# EAGLE board Vernier_Interface_Shield-Panel-v11 (EAGLE 6.5.0)
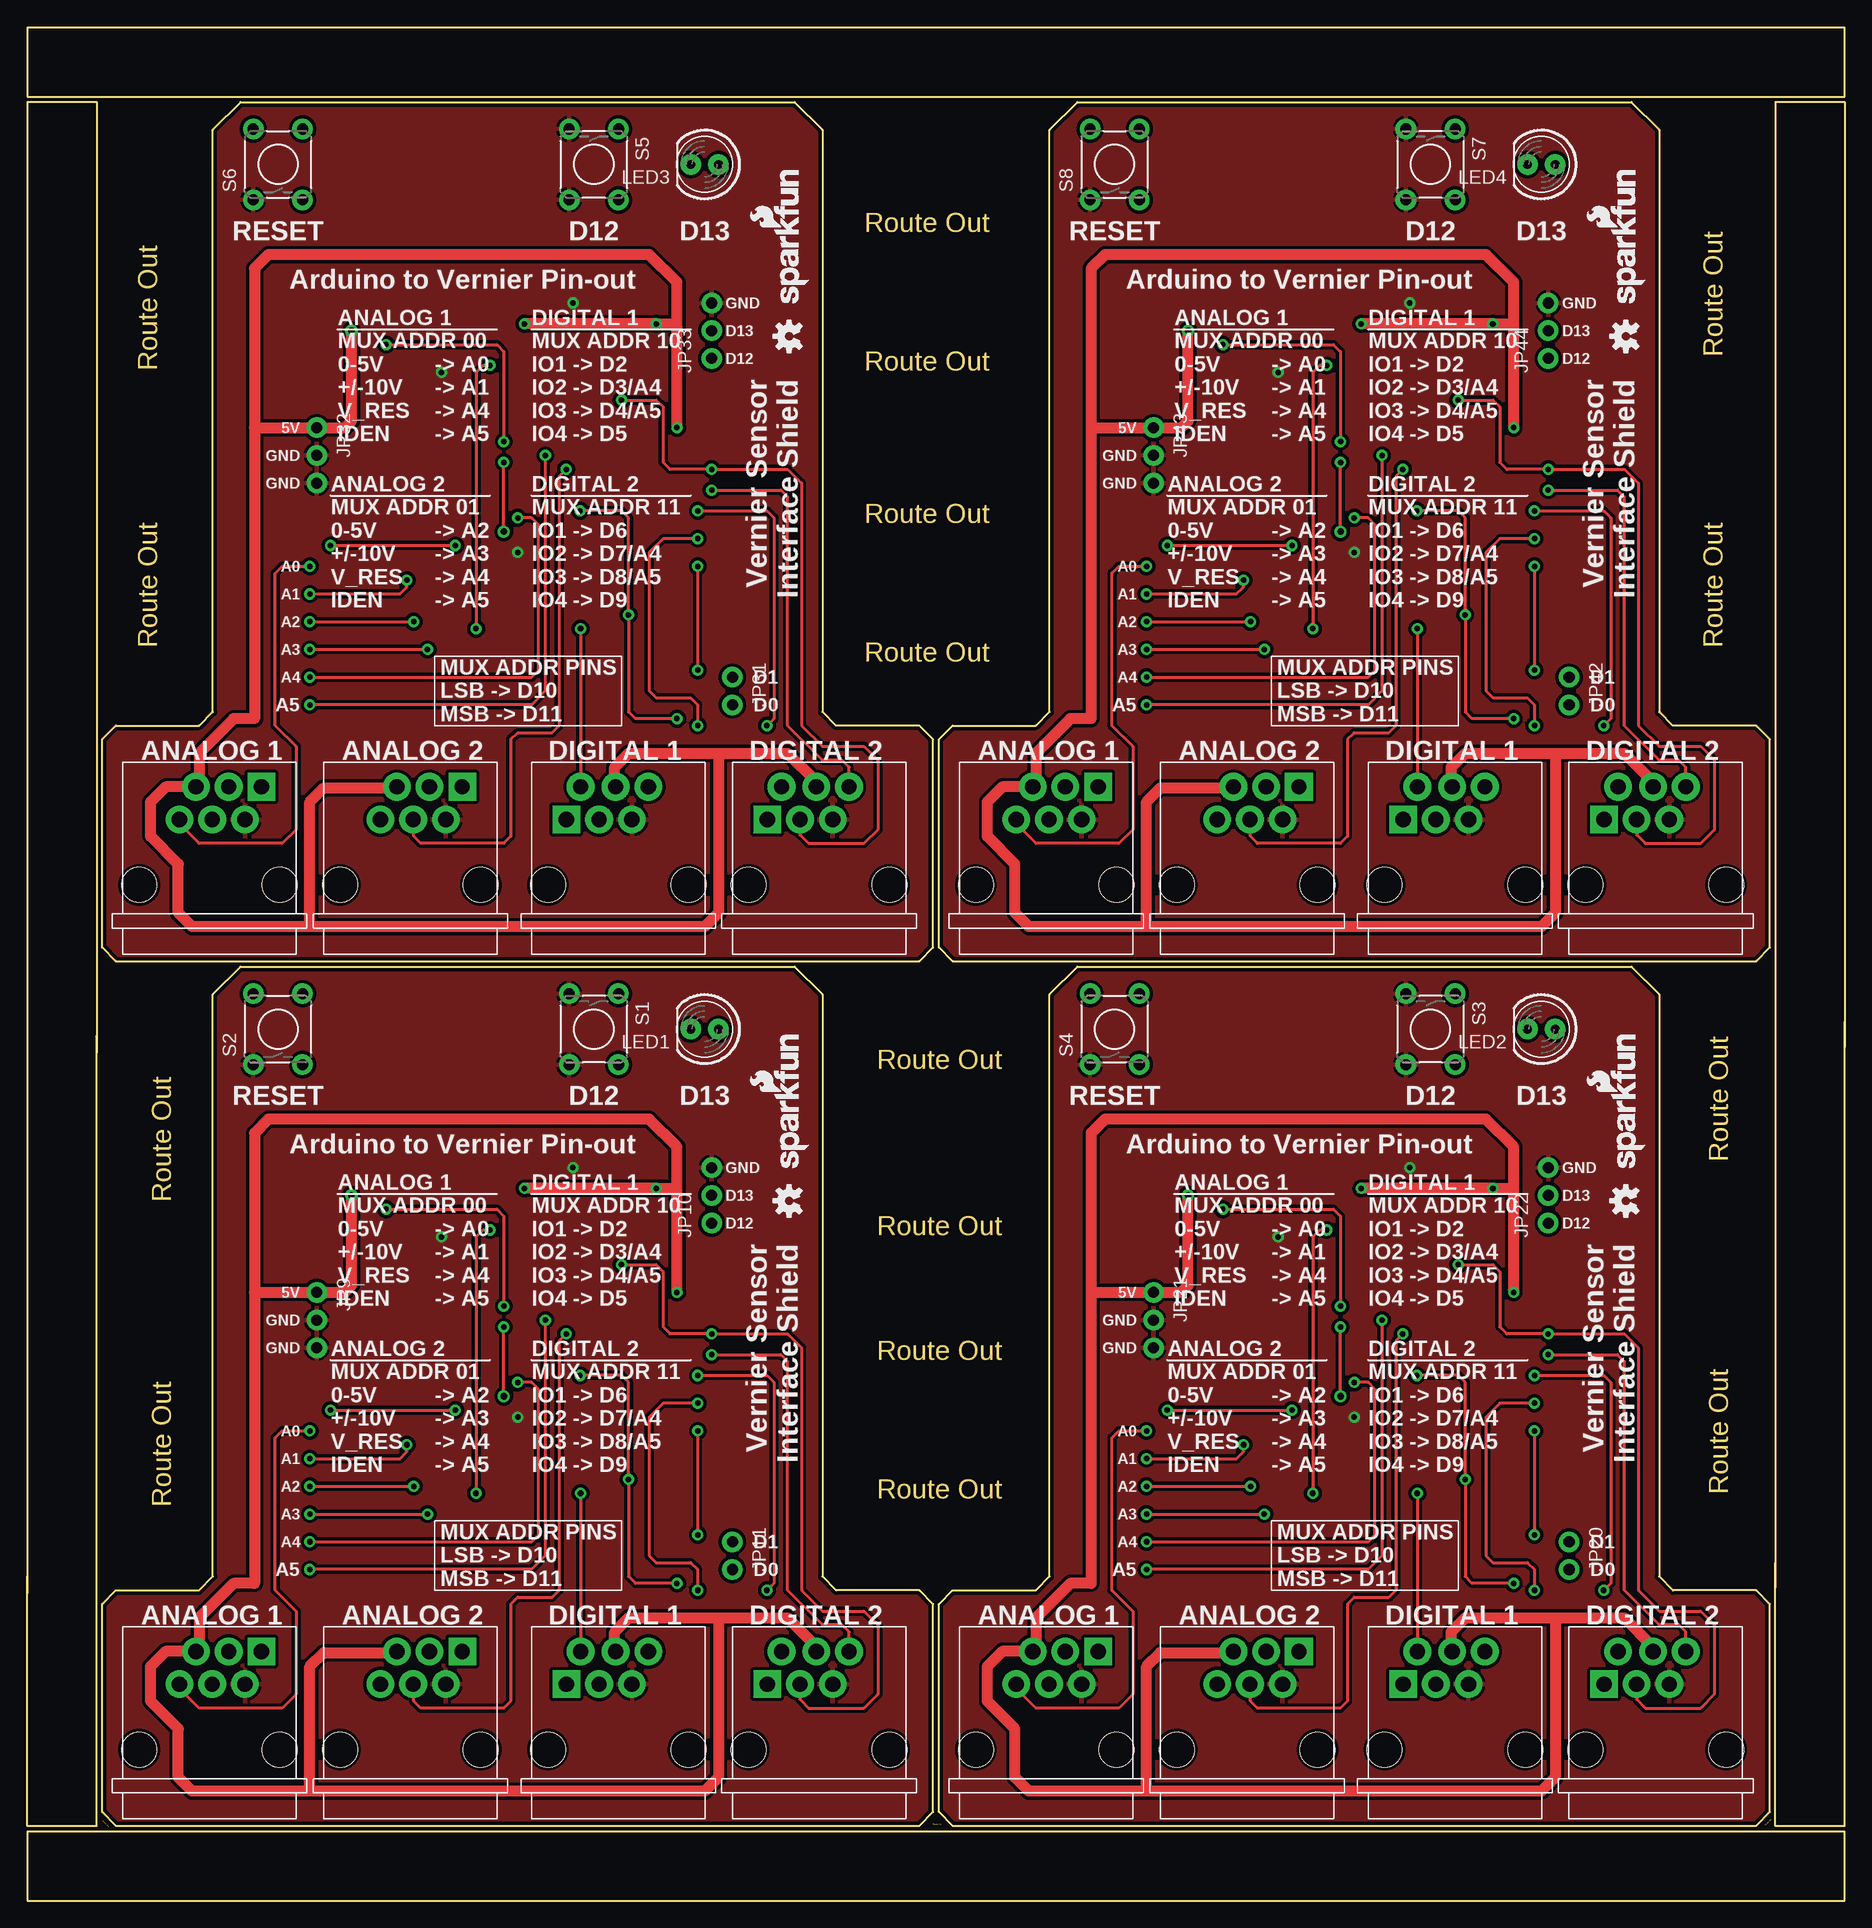
[diagram p0: board, top side]
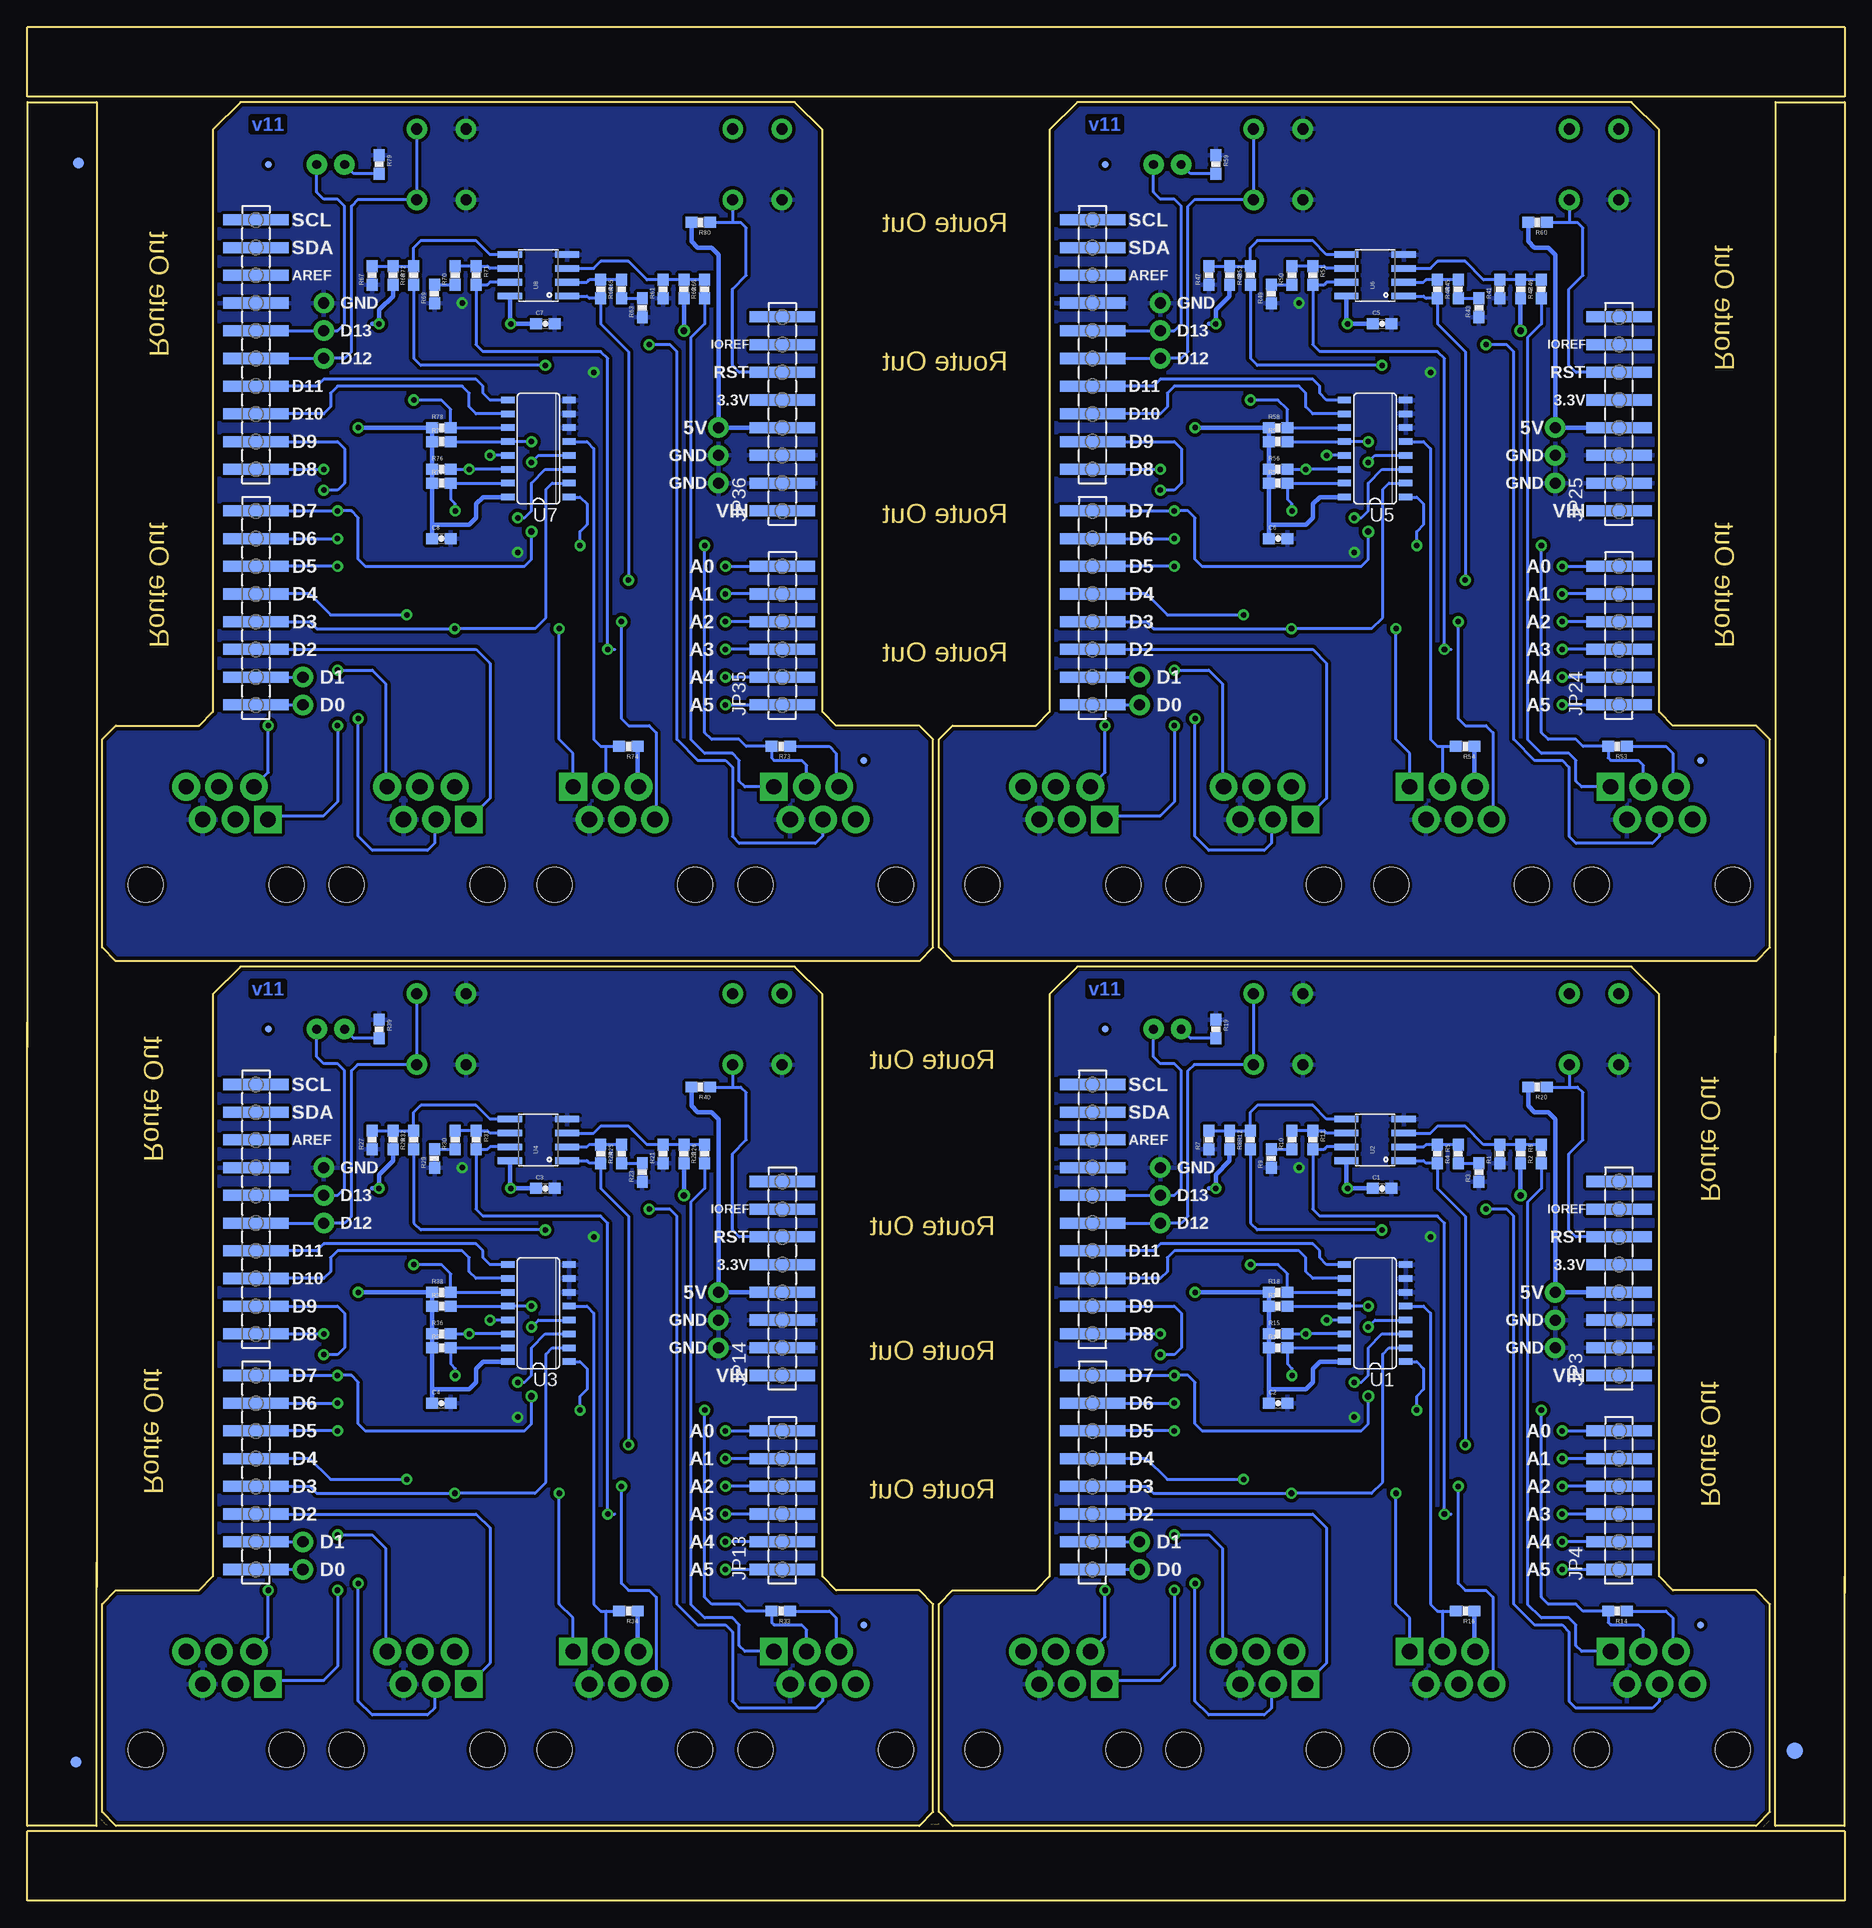
[diagram p1: board, bottom side, seen from below]

Size 166.62 x 171.7 mm. Coordinates in mm from the lower left corner, seen from the top.
Outline: 6.35,79.25 6.35,6.86 0,6.86 0,29.72
Outline: 166.62,80.52 166.62,6.86 160.27,6.86 160.27,30.99
Outline: 0,28.19 0,164.85 6.35,164.85 6.35,77.72
Outline: 160.27,28.7 160.27,164.85 166.62,164.85 166.62,78.23
Outline: 8.13,6.86 81.79,6.86 83.06,8.13 83.06,27.18 81.79,28.45 74.17,28.45 72.9,29.72 72.9,83.06 70.36,85.6 19.56,85.6 17.02,83.06 17.02,29.72 15.75,28.45 8.13,28.45 6.86,27.18 6.86,8.13 8.13,6.86
Outline: 84.84,6.86 158.5,6.86 159.77,8.13 159.77,27.18 158.5,28.45 150.88,28.45 149.61,29.72 149.61,83.06 147.07,85.6 96.27,85.6 93.73,83.06 93.73,29.72 92.46,28.45 84.84,28.45 83.57,27.18 83.57,8.13 84.84,6.86
Outline: 8.13,86.11 81.79,86.11 83.06,87.38 83.06,106.43 81.79,107.7 74.17,107.7 72.9,108.97 72.9,162.31 70.36,164.85 19.56,164.85 17.02,162.31 17.02,108.97 15.75,107.7 8.13,107.7 6.86,106.43 6.86,87.38 8.13,86.11
Outline: 84.84,86.11 158.5,86.11 159.77,87.38 159.77,106.43 158.5,107.7 150.88,107.7 149.61,108.97 149.61,162.31 147.07,164.85 96.27,164.85 93.73,162.31 93.73,108.97 92.46,107.7 84.84,107.7 83.57,106.43 83.57,87.38 84.84,86.11
Outline: 0,0 166.62,0 166.62,6.35 0,6.35 0,0
Outline: 0,165.35 166.62,165.35 166.62,171.7 0,171.7 0,165.35
Copper layers (1*16): Top 0.035mm / dielectric 1.5mm / Bottom 0.035mm
Design rules "SparkFun *": minimum track width 8mil, minimum drill 20mil, track to track 8mil, track to pad 8mil, pad to pad 8mil, via to via 8mil, smd to smd 8mil, copper to edge 8mil, drill to drill 8mil, minimum pad ring 12mil, minimum via ring 10mil, stop-mask expansion 4mil, vias tented up to drill 20mil, thermal gap 10mil

## Footprints (pad centres in the part's own frame; a part is rotated, then mirrored left to right if it is on the bottom)
0603-CAP = smd 1.1 x 1: 1 -0.85,0; 2 0.85,0
FIDUCIAL-1.5X3 = smd 1.5 x 1.5: 1 0,0
FIDUCIAL-1X2 = smd 1 x 1: 1 0,0
MICRO-FIDUCIAL = smd 0.635 x 0.635: 1 0,0
1X10_SMD_MALE = smd 1.02 x 6: 1 0,0; 2 2.54,0; 3 5.08,0; 4 7.62,0; 5 10.16,0; 6 12.7,0; 7 15.24,0; 8 17.78,0; 9 20.32,0; 10 22.86,0
1X08_SMD_MALE = smd 1.02 x 6: 1 0,0; 2 2.54,0; 3 5.08,0; 4 7.62,0; 5 10.16,0; 6 12.7,0; 7 15.24,0; 8 17.78,0
1X06_SMD_MALE = smd 1.02 x 6: 1 0,0; 2 2.54,0; 3 5.08,0; 4 7.62,0; 5 10.16,0; 6 12.7,0
BTA = drill 1.4 pad 2.54 square: 1 12.7,15.35 | drill 1.4 pad 2.54: 2 11.2,12.35; 3 9.7,15.35; 4 8.2,12.35; 5 6.7,15.35; 6 5.2,12.35 | hole 3.2: 14.4,6.35; 1.5,6.35
BTD = drill 1.4 pad 2.54 square: 1 3.2,12.35 | drill 1.4 pad 2.54: 2 4.5,15.35; 3 6.2,12.35; 4 7.7,15.35; 5 9.2,12.35; 6 10.7,15.35 | hole 3.2: 14.4,6.35; 1.5,6.35
1X03_NO_SILK = drill 1.016 pad 1.88: 1 0,0; 2 2.54,0; 3 5.08,0
1X02_NO_SILK = drill 1.016 pad 1.88: 1 0,0; 2 2.54,0
LED5MM = drill 0.813 pad 1.88: A -1.27,0; K 1.27,0
0603-RES = smd 1.1 x 1: 1 -0.85,0; 2 0.85,0
TACTILE-PTH = drill 1.016 pad 1.88: 1 -3.251,2.261; 2 3.251,2.261; 3 -3.251,-2.261; 4 3.251,-2.261
SO16 = smd 0.6 x 1.2: 1 -4.445,-2.8; 2 -3.175,-2.8; 3 -1.905,-2.8; 4 -0.635,-2.8; 5 0.635,-2.8; 6 1.905,-2.8; 7 3.175,-2.8; 8 4.445,-2.8; 9 4.445,2.8; 10 3.175,2.8; 11 1.905,2.8; 12 0.635,2.8; 13 -0.635,2.8; 14 -1.905,2.8; 15 -3.175,2.8; 16 -4.445,2.8
SO08 = smd 0.61 x 2.21: 1 -1.905,-2.616; 2 -0.635,-2.616; 3 0.635,-2.616; 4 1.905,-2.616; 5 1.905,2.616; 6 0.635,2.616; 7 -0.635,2.616; 8 -1.905,2.616

## Placement (x,y rotation side)
C1  0.1uF  [0603-CAP]  42.42,65.28 0 bottom
C2  0.1uF  [0603-CAP]  51.94,45.59 0 bottom
C3  0.1uF  [0603-CAP]  119.13,65.28 0 bottom
C4  0.1uF  [0603-CAP]  128.65,45.59 0 bottom
C5  0.1uF  [0603-CAP]  42.42,144.53 0 bottom
C6  0.1uF  [0603-CAP]  51.94,124.84 0 bottom
C7  0.1uF  [0603-CAP]  119.13,144.53 0 bottom
C8  0.1uF  [0603-CAP]  128.65,124.84 0 bottom
E$1  [FIDUCIAL-1.5X3]  4.57,13.72 0 bottom
E$4  [FIDUCIAL-1X2]  162.18,12.7 0 bottom
E$6  [FIDUCIAL-1X2]  161.93,159.26 180 bottom
FID1  FIDUCIALUFIDUCIAL  [MICRO-FIDUCIAL]  13.21,25.27 90 bottom
FID2  FIDUCIALUFIDUCIAL  [MICRO-FIDUCIAL]  67.82,79.88 0 bottom
FID3  FIDUCIALUFIDUCIAL  [MICRO-FIDUCIAL]  89.92,25.27 90 bottom
FID4  FIDUCIALUFIDUCIAL  [MICRO-FIDUCIAL]  144.53,79.88 0 bottom
FID5  FIDUCIALUFIDUCIAL  [MICRO-FIDUCIAL]  13.21,104.52 90 bottom
FID6  FIDUCIALUFIDUCIAL  [MICRO-FIDUCIAL]  67.82,159.13 0 bottom
FID7  FIDUCIALUFIDUCIAL  [MICRO-FIDUCIAL]  89.92,104.52 90 bottom
FID8  FIDUCIALUFIDUCIAL  [MICRO-FIDUCIAL]  144.53,159.13 0 bottom
JP1  Male  [1X10_SMD_MALE]  68.96,51.94 90 bottom
JP2  Male  [1X08_SMD_MALE]  68.96,30.35 90 bottom
JP3  Male  [1X08_SMD_MALE]  20.7,48.13 90 bottom
JP4  Male  [1X06_SMD_MALE]  20.7,30.35 90 bottom
JP5  BTA  [BTA]  8.76,7.49 0 top
JP6  BTA  [BTA]  27.18,7.49 0 top
JP7  BTD  [BTD]  46.23,7.49 0 top
JP8  BTD  [BTD]  64.64,7.49 0 top
JP9  [1X03_NO_SILK]  26.54,55.75 270 top
JP10  [1X03_NO_SILK]  62.74,62.1 90 top
JP11  M021X02_NO_SILK  [1X02_NO_SILK]  64.64,32.89 270 top
JP12  Male  [1X10_SMD_MALE]  145.67,51.94 90 bottom
JP13  Male  [1X06_SMD_MALE]  97.41,30.35 90 bottom
JP14  Male  [1X08_SMD_MALE]  97.41,48.13 90 bottom
JP15  Male  [1X08_SMD_MALE]  145.67,30.35 90 bottom
JP16  BTD  [BTD]  122.94,7.49 0 top
JP17  BTA  [BTA]  85.47,7.49 0 top
JP18  BTA  [BTA]  103.89,7.49 0 top
JP19  BTD  [BTD]  141.35,7.49 0 top
JP20  M021X02_NO_SILK  [1X02_NO_SILK]  141.35,32.89 270 top
JP21  [1X03_NO_SILK]  103.25,55.75 270 top
JP22  [1X03_NO_SILK]  139.45,62.1 90 top
JP23  Male  [1X10_SMD_MALE]  68.96,131.19 90 bottom
JP24  Male  [1X06_SMD_MALE]  20.7,109.6 90 bottom
JP25  Male  [1X08_SMD_MALE]  20.7,127.38 90 bottom
JP26  Male  [1X08_SMD_MALE]  68.96,109.6 90 bottom
JP27  BTD  [BTD]  46.23,86.74 0 top
JP28  BTA  [BTA]  8.76,86.74 0 top
JP29  BTA  [BTA]  27.18,86.74 0 top
JP30  BTD  [BTD]  64.64,86.74 0 top
JP31  M021X02_NO_SILK  [1X02_NO_SILK]  64.64,112.14 270 top
JP32  [1X03_NO_SILK]  26.54,135 270 top
JP33  [1X03_NO_SILK]  62.74,141.35 90 top
JP34  Male  [1X10_SMD_MALE]  145.67,131.19 90 bottom
JP35  Male  [1X06_SMD_MALE]  97.41,109.6 90 bottom
JP36  Male  [1X08_SMD_MALE]  97.41,127.38 90 bottom
JP37  Male  [1X08_SMD_MALE]  145.67,109.6 90 bottom
JP38  BTD  [BTD]  122.94,86.74 0 top
JP39  BTA  [BTA]  85.47,86.74 0 top
JP40  BTA  [BTA]  103.89,86.74 0 top
JP41  BTD  [BTD]  141.35,86.74 0 top
JP42  M021X02_NO_SILK  [1X02_NO_SILK]  141.35,112.14 270 top
JP43  [1X03_NO_SILK]  103.25,135 270 top
JP44  [1X03_NO_SILK]  139.45,141.35 90 top
LED1  [LED5MM]  62.1,79.88 180 top
LED2  [LED5MM]  138.81,79.88 180 top
LED3  [LED5MM]  62.1,159.13 180 top
LED4  [LED5MM]  138.81,159.13 180 top
LOGO1  OSHW-LOGOS  [OSHW-LOGO-S]  146.56,64.14 90 top
LOGO2  OSHW-LOGOS  [OSHW-LOGO-S]  69.85,64.14 90 top
LOGO3  OSHW-LOGOS  [OSHW-LOGO-S]  69.85,143.38 90 top
LOGO4  OSHW-LOGOS  [OSHW-LOGO-S]  146.56,143.38 90 top
LOGO_1  LOGO-SFESK  [SFE-LOGO-FLAME]  69.09,74.17 90 top
LOGO_2  LOGO-SFENW2  [SFE-NEW-WEB]  148.34,67.18 90 top
LOGO_3  LOGO-SFENW2  [SFE-NEW-WEB]  71.63,67.18 90 top
LOGO_4  LOGO-SFESK  [SFE-LOGO-FLAME]  145.8,74.17 90 top
LOGO_5  LOGO-SFENW2  [SFE-NEW-WEB]  71.63,146.43 90 top
LOGO_6  LOGO-SFESK  [SFE-LOGO-FLAME]  69.09,153.42 90 top
LOGO_7  LOGO-SFENW2  [SFE-NEW-WEB]  148.34,146.43 90 top
LOGO_8  LOGO-SFESK  [SFE-LOGO-FLAME]  145.8,153.42 90 top
R1  10K  [0603-RES]  31.62,68.45 90 bottom
R2  20k  [0603-RES]  27.81,68.45 90 bottom
R3  20k  [0603-RES]  33.53,66.75 90 bottom
R4  20k  [0603-RES]  35.43,68.45 90 bottom
R5  10K  [0603-RES]  37.34,68.45 270 bottom
R6  10K  [0603-RES]  29.72,68.45 270 bottom
R7  10K  [0603-RES]  58.29,69.72 90 bottom
R8  20k  [0603-RES]  54.48,69.72 90 bottom
R9  20k  [0603-RES]  52.58,68.02 90 bottom
R10  20k  [0603-RES]  50.67,69.72 90 bottom
R11  10K  [0603-RES]  48.77,69.72 270 bottom
R12  10K  [0603-RES]  56.39,69.72 270 bottom
R13  10K  [0603-RES]  51.94,54.48 0 bottom
R14  15K  [0603-RES]  20.83,26.54 180 bottom
R15  10K  [0603-RES]  51.94,51.94 0 bottom
R16  15K  [0603-RES]  34.8,26.54 180 bottom
R17  10K  [0603-RES]  51.94,50.67 0 bottom
R18  10K  [0603-RES]  51.94,55.75 0 bottom
R19  330  [0603-RES]  57.66,79.88 270 bottom
R20  10K  [0603-RES]  28.17,74.57 180 bottom
R21  10K  [0603-RES]  108.33,68.45 90 bottom
R22  20k  [0603-RES]  104.52,68.45 90 bottom
R23  20k  [0603-RES]  110.24,66.75 90 bottom
R24  20k  [0603-RES]  112.14,68.45 90 bottom
R25  10K  [0603-RES]  114.05,68.45 270 bottom
R26  10K  [0603-RES]  106.43,68.45 270 bottom
R27  10K  [0603-RES]  135,69.72 90 bottom
R28  20k  [0603-RES]  131.19,69.72 90 bottom
R29  20k  [0603-RES]  129.29,68.02 90 bottom
R30  20k  [0603-RES]  127.38,69.72 90 bottom
R31  10K  [0603-RES]  125.48,69.72 270 bottom
R32  10K  [0603-RES]  133.1,69.72 270 bottom
R33  15K  [0603-RES]  97.54,26.54 180 bottom
R34  15K  [0603-RES]  111.51,26.54 180 bottom
R35  10K  [0603-RES]  128.65,54.48 0 bottom
R36  10K  [0603-RES]  128.65,51.94 0 bottom
R37  10K  [0603-RES]  128.65,50.67 0 bottom
R38  10K  [0603-RES]  128.65,55.75 0 bottom
R39  330  [0603-RES]  134.37,79.88 270 bottom
R40  10K  [0603-RES]  104.88,74.57 180 bottom
R41  10K  [0603-RES]  31.62,147.7 90 bottom
R42  20k  [0603-RES]  27.81,147.7 90 bottom
R43  20k  [0603-RES]  33.53,146 90 bottom
R44  20k  [0603-RES]  35.43,147.7 90 bottom
R45  10K  [0603-RES]  37.34,147.7 270 bottom
R46  10K  [0603-RES]  29.72,147.7 270 bottom
R47  10K  [0603-RES]  58.29,148.97 90 bottom
R48  20k  [0603-RES]  54.48,148.97 90 bottom
R49  20k  [0603-RES]  52.58,147.27 90 bottom
R50  20k  [0603-RES]  50.67,148.97 90 bottom
R51  10K  [0603-RES]  48.77,148.97 270 bottom
R52  10K  [0603-RES]  56.39,148.97 270 bottom
R53  15K  [0603-RES]  20.83,105.79 180 bottom
R54  15K  [0603-RES]  34.8,105.79 180 bottom
R55  10K  [0603-RES]  51.94,133.73 0 bottom
R56  10K  [0603-RES]  51.94,131.19 0 bottom
R57  10K  [0603-RES]  51.94,129.92 0 bottom
R58  10K  [0603-RES]  51.94,135 0 bottom
R59  330  [0603-RES]  57.66,159.13 270 bottom
R60  10K  [0603-RES]  28.17,153.82 180 bottom
R61  10K  [0603-RES]  108.33,147.7 90 bottom
R62  20k  [0603-RES]  104.52,147.7 90 bottom
R63  20k  [0603-RES]  110.24,146 90 bottom
R64  20k  [0603-RES]  112.14,147.7 90 bottom
R65  10K  [0603-RES]  114.05,147.7 270 bottom
R66  10K  [0603-RES]  106.43,147.7 270 bottom
R67  10K  [0603-RES]  135,148.97 90 bottom
R68  20k  [0603-RES]  131.19,148.97 90 bottom
R69  20k  [0603-RES]  129.29,147.27 90 bottom
R70  20k  [0603-RES]  127.38,148.97 90 bottom
R71  10K  [0603-RES]  125.48,148.97 270 bottom
R72  10K  [0603-RES]  133.1,148.97 270 bottom
R73  15K  [0603-RES]  97.54,105.79 180 bottom
R74  15K  [0603-RES]  111.51,105.79 180 bottom
R75  10K  [0603-RES]  128.65,133.73 0 bottom
R76  10K  [0603-RES]  128.65,131.19 0 bottom
R77  10K  [0603-RES]  128.65,129.92 0 bottom
R78  10K  [0603-RES]  128.65,135 0 bottom
R79  330  [0603-RES]  134.37,159.13 270 bottom
R80  10K  [0603-RES]  104.88,153.82 180 bottom
S1  [TACTILE-PTH]  51.94,79.88 270 top
S2  [TACTILE-PTH]  22.99,79.88 90 top
S3  [TACTILE-PTH]  128.65,79.88 270 top
S4  [TACTILE-PTH]  99.69,79.88 90 top
S5  [TACTILE-PTH]  51.94,159.13 270 top
S6  [TACTILE-PTH]  22.99,159.13 90 top
S7  [TACTILE-PTH]  128.65,159.13 270 top
S8  [TACTILE-PTH]  99.69,159.13 90 top
U1  74HC4052SO  [SO16]  43.05,53.85 90 bottom
U2  LMV358  [SO08]  43.05,69.72 90 bottom
U3  74HC4052SO  [SO16]  119.76,53.85 90 bottom
U4  LMV358  [SO08]  119.76,69.72 90 bottom
U5  74HC4052SO  [SO16]  43.05,133.1 90 bottom
U6  LMV358  [SO08]  43.05,148.97 90 bottom
U7  74HC4052SO  [SO16]  119.76,133.1 90 bottom
U8  LMV358  [SO08]  119.76,148.97 90 bottom

## Library data of the parts
C1-C8 = SparkFun-Capacitors; PROD_ID: CAP-00810
E$1 E$4 E$6 FID1-FID8 LOGO1-LOGO4 LOGO_1-LOGO_8 = SparkFun-Aesthetics
JP1 JP12 JP23 JP34 = SparkFun-Connectors; PROD_ID: CONN-11291
JP2 JP3 JP14 JP15 JP25 JP26 JP36 JP37 = SparkFun-Connectors; PROD_ID: CONN-11292
JP4 JP13 JP24 JP35 = SparkFun-Connectors; PROD_ID: CONN-11293
JP5-JP11 JP16-JP22 JP27-JP33 JP38-JP44 = SparkFun-Connectors
LED1-LED4 = SparkFun-LED
R1 R5-R7 R11-R13 R15 R17 R18 R20 R21 R25-R27 R31 R32 R35-R38 R40 R41 R45-R47 R51 R52 R55-R58 R60 R61 R65-R67 R71 R72 R75-R78 R80 = SparkFun-Resistors; PROD_ID: RES-00824
R2-R4 R8-R10 R22-R24 R28-R30 R42-R44 R48-R50 R62-R64 R68-R70 = SparkFun-Resistors; PROD_ID: RES-09383
R14 R16 R33 R34 R53 R54 R73 R74 = SparkFun-Resistors; PROD_ID: RES-07854
R19 R39 R59 R79 = SparkFun-Resistors; PROD_ID: RES-00818
S1-S8 = SparkFun-Electromechanical
U1 U3 U5 U7 = SparkFun-AnalogIC; PROD_ID: IC-09813
U2 U4 U6 U8 = SparkFun-AnalogIC; PROD_ID: IC-09657

## Nets
0: JP2.1 JP11.2
1: JP2.2 JP11.1
2: JP12.5 JP22.1 S3.1 S3.2
3: JP15.1 JP20.2
3.3V: JP3.5
3.3V1: JP14.5
3.3V2: JP25.5
3.3V3: JP36.5
4: JP15.2 JP20.1
5: JP12.6 JP22.2 LED2.A
5V: C1.1 C2.1 JP3.4 JP5.5 JP6.5 JP7.4 JP8.4 JP9.1 R6.2 R12.2 R13.1 R14.1 R15.1 R16.1 R17.1 R18.1 R20.2 U1.16 U2.8
5V1: C3.1 C4.1 JP14.4 JP16.4 JP17.5 JP18.5 JP19.4 JP21.1 R26.2 R32.2 R33.1 R34.1 R35.1 R36.1 R37.1 R38.1 R40.2 U3.16 U4.8
5V2: C5.1 C6.1 JP25.4 JP27.4 JP28.5 JP29.5 JP30.4 JP32.1 R46.2 R52.2 R53.1 R54.1 R55.1 R56.1 R57.1 R58.1 R60.2 U5.16 U6.8
5V3: C7.1 C8.1 JP36.4 JP38.4 JP39.5 JP40.5 JP41.4 JP43.1 R66.2 R72.2 R73.1 R74.1 R75.1 R76.1 R77.1 R78.1 R80.2 U7.16 U8.8
6: JP23.5 JP33.1 S5.1 S5.2
7: JP26.1 JP31.2
8: JP26.2 JP31.1
9: JP23.6 JP33.2 LED3.A
10: JP34.5 JP44.1 S7.1 S7.2
11: JP37.1 JP42.2
12: JP1.5 JP10.1 S1.1 S1.2
13: JP1.6 JP10.2 LED1.A
14: JP37.2 JP42.1
15: JP34.6 JP44.2 LED4.A
A1: JP4.5 R5.2 U2.1
A2: JP13.2 U3.3
A3: JP4.3 R11.2 U2.7
A4: JP4.2 U1.3
A5: JP4.1 U1.13
A6: JP13.1 U3.13
A7: JP13.5 R25.2 U4.1
A8: JP13.3 R31.2 U4.7
A9: JP24.2 U5.3
A10: JP24.1 U5.13
A11: JP24.5 R45.2 U6.1
A12: JP24.3 R51.2 U6.7
A13: JP35.2 U7.3
A14: JP35.1 U7.13
A15: JP35.5 R65.2 U8.1
A16: JP35.3 R71.2 U8.7
AREF: JP1.8
AREF1: JP12.8
AREF2: JP23.8
AREF3: JP34.8
AS1_AN1: JP5.1 R2.1
AS1_AN2: JP4.6 JP5.6
AS1_AN3: JP17.1 R22.1
AS1_AN4: JP13.6 JP17.6
AS1_AN5: JP28.1 R42.1
AS1_AN6: JP24.6 JP28.6
AS1_AN7: JP39.1 R62.1
AS1_AN8: JP35.6 JP39.6
AS1_AUTOID: JP5.4 R13.2 U1.12
AS1_AUTOID1: JP17.4 R35.2 U3.12
AS1_AUTOID2: JP28.4 R55.2 U5.12
AS1_AUTOID3: JP39.4 R75.2 U7.12
AS1_VRES: JP5.3 R14.2 U1.1
AS1_VRES1: JP17.3 R33.2 U3.1
AS1_VRES2: JP28.3 R53.2 U5.1
AS1_VRES3: JP39.3 R73.2 U7.1
AS2_AN1: JP6.1 R8.1
AS2_AN2: JP4.4 JP6.6
AS2_AN3: JP13.4 JP18.6
AS2_AN4: JP18.1 R28.1
AS2_AN5: JP24.4 JP29.6
AS2_AN6: JP29.1 R48.1
AS2_AN7: JP35.4 JP40.6
AS2_AN8: JP40.1 R68.1
AS2_AUTOID: JP6.4 R15.2 U1.14
AS2_AUTOID1: JP18.4 R36.2 U3.14
AS2_AUTOID2: JP29.4 R56.2 U5.14
AS2_AUTOID3: JP40.4 R76.2 U7.14
AS2_VRES: JP6.3 R16.2 U1.5
AS2_VRES1: JP18.3 R34.2 U3.5
AS2_VRES2: JP29.3 R54.2 U5.5
AS2_VRES3: JP40.3 R74.2 U7.5
D1_IO1: JP2.3 JP7.1
D1_IO2: JP2.4 JP7.2 U1.2
D1_IO3: JP2.5 JP7.3 R17.2 U1.15
D1_IO4: JP2.6 JP7.6
D1_IO5: JP15.6 JP16.6
D1_IO6: JP15.5 JP16.3 R37.2 U3.15
D1_IO7: JP15.4 JP16.2 U3.2
D1_IO8: JP15.3 JP16.1
D1_IO9: JP26.6 JP27.6
D1_IO10: JP26.5 JP27.3 R57.2 U5.15
D1_IO11: JP26.4 JP27.2 U5.2
D1_IO12: JP26.3 JP27.1
D1_IO13: JP37.6 JP38.6
D1_IO14: JP37.5 JP38.3 R77.2 U7.15
D1_IO15: JP37.4 JP38.2 U7.2
D1_IO16: JP37.3 JP38.1
D2_IO1: JP2.7 JP8.1
D2_IO2: JP2.8 JP8.2 U1.4
D2_IO3: JP1.1 JP8.3 R18.2 U1.11
D2_IO4: JP1.2 JP8.6
D2_IO5: JP12.2 JP19.6
D2_IO6: JP12.1 JP19.3 R38.2 U3.11
D2_IO7: JP15.8 JP19.2 U3.4
D2_IO8: JP15.7 JP19.1
D2_IO9: JP23.2 JP30.6
D2_IO10: JP23.1 JP30.3 R58.2 U5.11
D2_IO11: JP26.8 JP30.2 U5.4
D2_IO12: JP26.7 JP30.1
D2_IO13: JP34.2 JP41.6
D2_IO14: JP34.1 JP41.3 R78.2 U7.11
D2_IO15: JP37.8 JP41.2 U7.4
D2_IO16: JP37.7 JP41.1
GND: C1.2 C2.2 JP1.7 JP3.2 JP3.3 JP5.2 JP6.2 JP7.5 JP8.5 JP9.2 JP9.3 JP10.3 R1.1 R3.1 R7.1 R9.1 R19.1 S1.3 S1.4 S2.1 U1.6 U1.7 U1.8 U2.4
GND1: C3.2 C4.2 JP12.7 JP14.2 JP14.3 JP16.5 JP17.2 JP18.2 JP19.5 JP21.2 JP21.3 JP22.3 R21.1 R23.1 R27.1 R29.1 R39.1 S3.3 S3.4 S4.1 U3.6 U3.7 U3.8 U4.4
GND2: C5.2 C6.2 JP23.7 JP25.2 JP25.3 JP27.5 JP28.2 JP29.2 JP30.5 JP32.2 JP32.3 JP33.3 R41.1 R43.1 R47.1 R49.1 R59.1 S5.3 S5.4 S6.1 U5.6 U5.7 U5.8 U6.4
GND3: C7.2 C8.2 JP34.7 JP36.2 JP36.3 JP38.5 JP39.2 JP40.2 JP41.5 JP43.2 JP43.3 JP44.3 R61.1 R63.1 R67.1 R69.1 R79.1 S7.3 S7.4 S8.1 U7.6 U7.7 U7.8 U8.4
IOREF: JP3.7
IOREF1: JP14.7
IOREF2: JP25.7
IOREF3: JP36.7
MUX_A0: JP1.3 U1.10
MUX_A1: JP1.4 U1.9
MUX_A2: JP12.3 U3.10
MUX_A3: JP12.4 U3.9
MUX_A4: JP23.3 U5.10
MUX_A5: JP23.4 U5.9
MUX_A6: JP34.3 U7.10
MUX_A7: JP34.4 U7.9
N$1: R1.2 R2.2 R6.1 U2.3
N$2: R3.2 R4.1
N$3: R4.2 R5.1 U2.2
N$4: R23.2 R24.1
N$5: R9.2 R10.1
N$6: R7.2 R8.2 R12.1 U2.5
N$8: R10.2 R11.1 U2.6
N$9: LED1.K R19.2
N$24: R21.2 R22.2 R26.1 U4.3
N$25: R24.2 R25.1 U4.2
N$26: R29.2 R30.1
N$28: R27.2 R28.2 R32.1 U4.5
N$29: R30.2 R31.1 U4.6
N$30: LED2.K R39.2
N$31: R43.2 R44.1
N$32: R41.2 R42.2 R46.1 U6.3
N$33: R44.2 R45.1 U6.2
N$34: R49.2 R50.1
N$35: R47.2 R48.2 R52.1 U6.5
N$36: R50.2 R51.1 U6.6
N$37: LED3.K R59.2
N$38: R63.2 R64.1
N$39: R61.2 R62.2 R66.1 U8.3
N$40: R64.2 R65.1 U8.2
N$41: R69.2 R70.1
N$42: R67.2 R68.2 R72.1 U8.5
N$43: R70.2 R71.1 U8.6
N$44: LED4.K R79.2
RESET: JP3.6 R20.1 S2.3
RESET1: JP14.6 R40.1 S4.3
RESET2: JP25.6 R60.1 S6.3
RESET3: JP36.6 R80.1 S8.3
SCL: JP1.10
SCL1: JP12.10
SCL2: JP23.10
SCL3: JP34.10
SDA: JP1.9
SDA1: JP12.9
SDA2: JP23.9
SDA3: JP34.9
VIN: JP3.1
VIN1: JP14.1
VIN2: JP25.1
VIN3: JP36.1

## Tracks (layer width: path | path; a pad name or v marks a point on that pad's centre or on a via)
0
  Bottom 0.254: JP2.1 JP11.2
1
  Bottom 0.254: JP2.2 JP11.1
2
  Bottom 0.254: S3.1 S3.2 136.35,76.63 136.91,76.07 136.91,62.74 137.54,62.1 JP22.1 JP12.5
3
  Bottom 0.254: JP15.1 JP20.2
4
  Bottom 0.254: JP15.2 JP20.1
5
  Bottom 0.254: JP12.6 JP22.2 138.18,64.64 137.54,65.28 137.54,76.07 138.18,76.71 139.45,76.71 140.08,77.34 LED2.A
5V  (via drill 0.51, 0.6)
  Top 1.016: 25.91,10.03 62.1,10.03 63.37,11.3 63.37,25.91 | 25.91,10.03 15.11,10.03 13.84,11.3 13.84,15.75 11.3,18.29 11.3,21.46 12.68,22.84 JP5.5 15.75,23.13 15.75,25.91 18.92,29.08 20.83,29.08 20.83,55.75 | 25.91,10.03 25.91,21.46 27.18,22.73 33.77,22.73 JP6.5 | v29.72,64.64 29.72,56.39 29.08,55.75 JP9.1 20.83,55.75 | 20.83,55.75 20.83,70.36 22.1,71.63 57.02,71.63 59.56,69.09 59.56,65.28 | v45.59,65.28 v57.66,65.28 59.56,65.28 | v59.56,55.75 59.56,65.28 | JP8.4 72.34,23.29 69.72,25.91 63.37,25.91 | JP7.4 53.85,22.92 53.85,24.64 55.12,25.91 63.37,25.91
  Bottom 0.254: JP6.5 33.95,22.91 | R14.1 16.38,26.54 15.75,25.91 15.75,23.13 JP5.5
  Bottom 0.406: 52.79,46.86 R17.1 R15.1 R13.1 R18.1 v59.56,55.75 | 52.79,46.86 C2.1 | U1.16 48.13,49.4 48.77,48.77 48.77,47.5 49.4,46.86 52.79,46.86 | 33.95,22.91 R16.1 | R6.2 v29.72,64.64 | C1.1 v45.59,65.28 45.67,65.35 U2.8 | JP3.4 JP9.1 26.54,71.63 27.18,72.26 28.45,72.26 29.02,72.84 R20.2 | 58.29,65.28 v57.66,65.28 57.66,66.55 56.39,67.82 R12.2
5V1  (via drill 0.51, 0.6)
  Top 1.016: 102.62,10.03 138.81,10.03 140.08,11.3 140.08,25.91 | 102.62,10.03 91.82,10.03 90.55,11.3 90.55,15.75 88.01,18.29 88.01,21.46 89.39,22.84 JP17.5 92.46,23.13 92.46,25.91 95.63,29.08 97.54,29.08 97.54,55.75 | 102.62,10.03 102.62,21.46 103.89,22.73 110.48,22.73 JP18.5 | v106.43,64.64 106.43,56.39 105.79,55.75 JP21.1 97.54,55.75 | 97.54,55.75 97.54,70.36 98.81,71.63 133.73,71.63 136.27,69.09 136.27,65.28 | v122.3,65.28 v134.37,65.28 136.27,65.28 | v136.27,55.75 136.27,65.28 | JP19.4 149.05,23.29 146.43,25.91 140.08,25.91 | JP16.4 130.56,22.92 130.56,24.64 131.83,25.91 140.08,25.91
  Bottom 0.254: JP18.5 110.66,22.91 | R33.1 93.09,26.54 92.46,25.91 92.46,23.13 JP17.5
  Bottom 0.406: 129.5,46.86 R37.1 R36.1 R35.1 R38.1 v136.27,55.75 | 129.5,46.86 C4.1 | U3.16 124.84,49.4 125.48,48.77 125.48,47.5 126.11,46.86 129.5,46.86 | 110.66,22.91 R34.1 | R26.2 v106.43,64.64 | C3.1 v122.3,65.28 122.38,65.35 U4.8 | JP14.4 JP21.1 103.25,71.63 103.89,72.26 105.16,72.26 105.73,72.84 R40.2 | 135,65.28 v134.37,65.28 134.37,66.55 133.1,67.82 R32.2
5V2  (via drill 0.51, 0.6)
  Top 1.016: 25.91,89.28 62.1,89.28 63.37,90.55 63.37,105.16 | 25.91,89.28 15.11,89.28 13.84,90.55 13.84,95 11.3,97.54 11.3,100.71 12.68,102.09 JP28.5 15.75,102.38 15.75,105.16 18.92,108.33 20.83,108.33 20.83,135 | 25.91,89.28 25.91,100.71 27.18,101.98 33.77,101.98 JP29.5 | v29.72,143.89 29.72,135.64 29.08,135 JP32.1 20.83,135 | 20.83,135 20.83,149.61 22.1,150.88 57.02,150.88 59.56,148.34 59.56,144.53 | v45.59,144.53 v57.66,144.53 59.56,144.53 | v59.56,135 59.56,144.53 | JP30.4 72.34,102.54 69.72,105.16 63.37,105.16 | JP27.4 53.85,102.17 53.85,103.89 55.12,105.16 63.37,105.16
  Bottom 0.254: JP29.5 33.95,102.16 | R53.1 16.38,105.79 15.75,105.16 15.75,102.38 JP28.5
  Bottom 0.406: 52.79,126.11 R57.1 R56.1 R55.1 R58.1 v59.56,135 | 52.79,126.11 C6.1 | U5.16 48.13,128.65 48.77,128.02 48.77,126.75 49.4,126.11 52.79,126.11 | 33.95,102.16 R54.1 | R46.2 v29.72,143.89 | C5.1 v45.59,144.53 45.67,144.6 U6.8 | JP25.4 JP32.1 26.54,150.88 27.18,151.51 28.45,151.51 29.02,152.09 R60.2 | 58.29,144.53 v57.66,144.53 57.66,145.8 56.39,147.07 R52.2
5V3  (via drill 0.51, 0.6)
  Top 1.016: 102.62,89.28 138.81,89.28 140.08,90.55 140.08,105.16 | 102.62,89.28 91.82,89.28 90.55,90.55 90.55,95 88.01,97.54 88.01,100.71 89.39,102.09 JP39.5 92.46,102.38 92.46,105.16 95.63,108.33 97.54,108.33 97.54,135 | 102.62,89.28 102.62,100.71 103.89,101.98 110.48,101.98 JP40.5 | v106.43,143.89 106.43,135.64 105.79,135 JP43.1 97.54,135 | 97.54,135 97.54,149.61 98.81,150.88 133.73,150.88 136.27,148.34 136.27,144.53 | v122.3,144.53 v134.37,144.53 136.27,144.53 | v136.27,135 136.27,144.53 | JP41.4 149.05,102.54 146.43,105.16 140.08,105.16 | JP38.4 130.56,102.17 130.56,103.89 131.83,105.16 140.08,105.16
  Bottom 0.254: JP40.5 110.66,102.16 | R73.1 93.09,105.79 92.46,105.16 92.46,102.38 JP39.5
  Bottom 0.406: 129.5,126.11 R77.1 R76.1 R75.1 R78.1 v136.27,135 | 129.5,126.11 C8.1 | U7.16 124.84,128.65 125.48,128.02 125.48,126.75 126.11,126.11 129.5,126.11 | 110.66,102.16 R74.1 | R66.2 v106.43,143.89 | C7.1 v122.3,144.53 122.38,144.6 U8.8 | JP36.4 JP43.1 103.25,150.88 103.89,151.51 105.16,151.51 105.73,152.09 R80.2 | 135,144.53 v134.37,144.53 134.37,145.8 133.1,147.07 R72.2
6
  Bottom 0.254: S5.1 S5.2 59.64,155.88 60.2,155.32 60.2,141.99 60.83,141.35 JP33.1 JP23.5
7
  Bottom 0.254: JP26.1 JP31.2
8
  Bottom 0.254: JP26.2 JP31.1
9
  Bottom 0.254: JP23.6 JP33.2 61.47,143.89 60.83,144.53 60.83,155.32 61.47,155.96 62.74,155.96 63.37,156.59 LED3.A
10
  Bottom 0.254: S7.1 S7.2 136.35,155.88 136.91,155.32 136.91,141.99 137.54,141.35 JP44.1 JP34.5
11
  Bottom 0.254: JP37.1 JP42.2
12
  Bottom 0.254: S1.1 S1.2 59.64,76.63 60.2,76.07 60.2,62.74 60.83,62.1 JP10.1 JP1.5
13
  Bottom 0.254: JP1.6 JP10.2 61.47,64.64 60.83,65.28 60.83,76.07 61.47,76.71 62.74,76.71 63.37,77.34 LED1.A
14
  Bottom 0.254: JP37.2 JP42.1
15
  Bottom 0.254: JP34.6 JP44.2 138.18,143.89 137.54,144.53 137.54,155.32 138.18,155.96 139.45,155.96 140.08,156.59 LED4.A
A1  (via drill 0.51)
  Top 0.254: v25.91,40.51 34.16,40.51 34.8,41.15 v34.8,41.78
  Bottom 0.254: v34.8,41.78 34.8,62.74 37.34,65.28 R5.2 38.39,67.6 38.61,67.82 U2.1 | JP4.5 v25.91,40.51
A2  (via drill 0.51)
  Top 0.254: v102.62,32.89 122.94,32.89 123.57,33.53 123.57,46.86 122.94,47.5 v121.67,47.5
  Bottom 0.254: JP13.2 v102.62,32.89 | v121.67,47.5 121.03,47.5 120.4,48.13 120.4,50.67 119.13,51.94 U3.3
A3  (via drill 0.51)
  Top 0.254: v25.91,35.43 v36.7,35.43
  Bottom 0.254: U2.7 47.5,69.09 47.71,68.87 R11.2 48.77,63.37 48.13,62.74 37.34,62.74 36.7,62.1 v36.7,35.43 36.07,35.43 | JP4.3 v25.91,35.43
A4  (via drill 0.51)
  Top 0.254: v25.91,32.89 46.23,32.89 46.86,33.53 46.86,46.86 46.23,47.5 v44.96,47.5
  Bottom 0.254: JP4.2 v25.91,32.89 | v44.96,47.5 44.32,47.5 43.69,48.13 43.69,50.67 42.42,51.94 U1.3
A5  (via drill 0.51)
  Top 0.254: v47.5,53.21 47.5,31.62 46.23,30.35 v25.91,30.35
  Bottom 0.254: U1.13 v47.5,53.21 | v25.91,30.35 JP4.1
A6  (via drill 0.51)
  Top 0.254: v124.21,53.21 124.21,31.62 122.94,30.35 v102.62,30.35
  Bottom 0.254: U3.13 v124.21,53.21 | v102.62,30.35 JP13.1
A7  (via drill 0.51)
  Top 0.254: v102.62,40.51 110.87,40.51 111.51,41.15 v111.51,41.78
  Bottom 0.254: v111.51,41.78 111.51,62.74 114.05,65.28 R25.2 115.1,67.6 115.32,67.82 U4.1 | JP13.5 v102.62,40.51
A8  (via drill 0.51)
  Top 0.254: v102.62,35.43 v113.41,35.43
  Bottom 0.254: U4.7 124.21,69.09 124.42,68.87 R31.2 125.48,63.37 124.84,62.74 114.05,62.74 113.41,62.1 v113.41,35.43 112.78,35.43 | JP13.3 v102.62,35.43
A9  (via drill 0.51)
  Top 0.254: v25.91,112.14 46.23,112.14 46.86,112.78 46.86,126.11 46.23,126.75 v44.96,126.75
  Bottom 0.254: JP24.2 v25.91,112.14 | v44.96,126.75 44.32,126.75 43.69,127.38 43.69,129.92 42.42,131.19 U5.3
A10  (via drill 0.51)
  Top 0.254: v47.5,132.46 47.5,110.87 46.23,109.6 v25.91,109.6
  Bottom 0.254: U5.13 v47.5,132.46 | v25.91,109.6 JP24.1
A11  (via drill 0.51)
  Top 0.254: v25.91,119.76 34.16,119.76 34.8,120.4 v34.8,121.03
  Bottom 0.254: v34.8,121.03 34.8,141.99 37.34,144.53 R45.2 38.39,146.85 38.61,147.07 U6.1 | JP24.5 v25.91,119.76
A12  (via drill 0.51)
  Top 0.254: v25.91,114.68 v36.7,114.68
  Bottom 0.254: U6.7 47.5,148.34 47.71,148.12 R51.2 48.77,142.62 48.13,141.99 37.34,141.99 36.7,141.35 v36.7,114.68 36.07,114.68 | JP24.3 v25.91,114.68
A13  (via drill 0.51)
  Top 0.254: v102.62,112.14 122.94,112.14 123.57,112.78 123.57,126.11 122.94,126.75 v121.67,126.75
  Bottom 0.254: JP35.2 v102.62,112.14 | v121.67,126.75 121.03,126.75 120.4,127.38 120.4,129.92 119.13,131.19 U7.3
A14  (via drill 0.51)
  Top 0.254: v124.21,132.46 124.21,110.87 122.94,109.6 v102.62,109.6
  Bottom 0.254: U7.13 v124.21,132.46 | v102.62,109.6 JP35.1
A15  (via drill 0.51)
  Top 0.254: v102.62,119.76 110.87,119.76 111.51,120.4 v111.51,121.03
  Bottom 0.254: v111.51,121.03 111.51,141.99 114.05,144.53 R65.2 115.1,146.85 115.32,147.07 U8.1 | JP35.5 v102.62,119.76
A16  (via drill 0.51)
  Top 0.254: v102.62,114.68 v113.41,114.68
  Bottom 0.254: U8.7 124.21,148.34 124.42,148.12 R71.2 125.48,142.62 124.84,141.99 114.05,141.99 113.41,141.35 v113.41,114.68 112.78,114.68 | JP35.3 v102.62,114.68
AS1_AN1
  Bottom 0.254: R2.1 27.81,65.28 29.08,64.01 29.08,27.18 27.81,25.91 25.27,25.91 24.64,25.27 24.64,23.37 24.11,22.84 JP5.1
AS1_AN2  (via drill 0.51)
  Top 0.254: v25.91,43.05 23.37,43.05 22.73,42.42 22.73,28.45 24.64,26.54 24.64,18.92 23.37,17.65 15.75,17.65 13.96,19.44 JP5.6
  Bottom 0.254: v25.91,43.05 JP4.6
AS1_AN3
  Bottom 0.254: R22.1 104.52,65.28 105.79,64.01 105.79,27.18 104.52,25.91 101.98,25.91 101.35,25.27 101.35,23.37 100.82,22.84 JP17.1
AS1_AN4  (via drill 0.51)
  Top 0.254: v102.62,43.05 100.08,43.05 99.44,42.42 99.44,28.45 101.35,26.54 101.35,18.92 100.08,17.65 92.46,17.65 90.67,19.44 JP17.6
  Bottom 0.254: v102.62,43.05 JP13.6
AS1_AN5
  Bottom 0.254: R42.1 27.81,144.53 29.08,143.26 29.08,106.43 27.81,105.16 25.27,105.16 24.64,104.52 24.64,102.62 24.11,102.09 JP28.1
AS1_AN6  (via drill 0.51)
  Top 0.254: v25.91,122.3 23.37,122.3 22.73,121.67 22.73,107.7 24.64,105.79 24.64,98.17 23.37,96.9 15.75,96.9 13.96,98.69 JP28.6
  Bottom 0.254: v25.91,122.3 JP24.6
AS1_AN7
  Bottom 0.254: R62.1 104.52,144.53 105.79,143.26 105.79,106.43 104.52,105.16 101.98,105.16 101.35,104.52 101.35,102.62 100.82,102.09 JP39.1
AS1_AN8  (via drill 0.51)
  Top 0.254: v102.62,122.3 100.08,122.3 99.44,121.67 99.44,107.7 101.35,105.79 101.35,98.17 100.08,96.9 92.46,96.9 90.67,98.69 JP39.6
  Bottom 0.254: v102.62,122.3 JP35.6
AS1_AUTOID  (via drill 0.51)
  Top 0.254: v32.89,63.37 43.05,63.37 43.69,62.74 v43.69,54.48
  Bottom 0.254: R13.2 U1.12 v43.69,54.48 | JP5.4 17.02,19.79 17.02,18.29 17.65,17.65 24.64,17.65 25.27,18.29 25.27,24.64 25.91,25.27 28.45,25.27 30.35,27.18 30.35,62.74 30.99,63.37 v32.89,63.37
AS1_AUTOID1  (via drill 0.51)
  Top 0.254: v109.6,63.37 119.76,63.37 120.4,62.74 v120.4,54.48
  Bottom 0.254: R35.2 U3.12 v120.4,54.48 | JP17.4 93.73,19.79 93.73,18.29 94.36,17.65 101.35,17.65 101.98,18.29 101.98,24.64 102.62,25.27 105.16,25.27 107.06,27.18 107.06,62.74 107.7,63.37 v109.6,63.37
AS1_AUTOID2  (via drill 0.51)
  Top 0.254: v32.89,142.62 43.05,142.62 43.69,141.99 v43.69,133.73
  Bottom 0.254: R55.2 U5.12 v43.69,133.73 | JP28.4 17.02,99.04 17.02,97.54 17.65,96.9 24.64,96.9 25.27,97.54 25.27,103.89 25.91,104.52 28.45,104.52 30.35,106.43 30.35,141.99 30.99,142.62 v32.89,142.62
AS1_AUTOID3  (via drill 0.51)
  Top 0.254: v109.6,142.62 119.76,142.62 120.4,141.99 v120.4,133.73
  Bottom 0.254: R75.2 U7.12 v120.4,133.73 | JP39.4 93.73,99.04 93.73,97.54 94.36,96.9 101.35,96.9 101.98,97.54 101.98,103.89 102.62,104.52 105.16,104.52 107.06,106.43 107.06,141.99 107.7,142.62 v109.6,142.62
AS1_VRES  (via drill 0.51)
  Top 0.254: v27.81,44.96 v39.24,44.96
  Bottom 0.254: JP5.3 18.46,24.81 18.92,25.27 21.46,25.27 21.68,25.49 R14.2 24,26.54 24.64,27.18 27.18,27.18 27.81,27.81 v27.81,44.96 | v39.24,44.96 39.24,46.23 38.61,46.86 38.61,48.77 39.24,49.4 U1.1
AS1_VRES1  (via drill 0.51)
  Top 0.254: v104.52,44.96 v115.95,44.96
  Bottom 0.254: JP17.3 95.17,24.81 95.63,25.27 98.17,25.27 98.39,25.49 R33.2 100.71,26.54 101.35,27.18 103.89,27.18 104.52,27.81 v104.52,44.96 | v115.95,44.96 115.95,46.23 115.32,46.86 115.32,48.77 115.95,49.4 U3.1
AS1_VRES2  (via drill 0.51)
  Top 0.254: v27.81,124.21 v39.24,124.21
  Bottom 0.254: JP28.3 18.46,104.06 18.92,104.52 21.46,104.52 21.68,104.74 R53.2 24,105.79 24.64,106.43 27.18,106.43 27.81,107.06 v27.81,124.21 | v39.24,124.21 39.24,125.48 38.61,126.11 38.61,128.02 39.24,128.65 U5.1
AS1_VRES3  (via drill 0.51)
  Top 0.254: v104.52,124.21 v115.95,124.21
  Bottom 0.254: JP39.3 95.17,104.06 95.63,104.52 98.17,104.52 98.39,104.74 R73.2 100.71,105.79 101.35,106.43 103.89,106.43 104.52,107.06 v104.52,124.21 | v115.95,124.21 115.95,125.48 115.32,126.11 115.32,128.02 115.95,128.65 U7.1
AS2_AN1  (via drill 0.51)
  Top 0.254: v41.15,37.34 41.15,60.83 41.78,61.47 v42.42,61.47
  Bottom 0.254: v42.42,61.47 53.85,61.47 54.48,62.1 R8.1 | JP6.1 39.88,25.91 41.15,27.18 v41.15,37.34
AS2_AN2  (via drill 0.51)
  Top 0.254: v25.91,37.97 v35.43,37.97
  Bottom 0.254: JP4.4 v25.91,37.97 | v35.43,37.97 35.43,29.08 34.8,28.45 32.89,28.45 32.26,27.81 32.26,19.96 JP6.6
AS2_AN3  (via drill 0.51)
  Top 0.254: v102.62,37.97 v112.14,37.97
  Bottom 0.254: JP13.4 v102.62,37.97 | v112.14,37.97 112.14,29.08 111.51,28.45 109.6,28.45 108.97,27.81 108.97,19.96 JP18.6
AS2_AN4  (via drill 0.51)
  Top 0.254: v117.86,37.34 117.86,60.83 118.49,61.47 v119.13,61.47
  Bottom 0.254: v119.13,61.47 130.56,61.47 131.19,62.1 R28.1 | JP18.1 116.59,25.91 117.86,27.18 v117.86,37.34
AS2_AN5  (via drill 0.51)
  Top 0.254: v25.91,117.22 v35.43,117.22
  Bottom 0.254: JP24.4 v25.91,117.22 | v35.43,117.22 35.43,108.33 34.8,107.7 32.89,107.7 32.26,107.06 32.26,99.21 JP29.6
AS2_AN6  (via drill 0.51)
  Top 0.254: v41.15,116.59 41.15,140.08 41.78,140.72 v42.42,140.72
  Bottom 0.254: v42.42,140.72 53.85,140.72 54.48,141.35 R48.1 | JP29.1 39.88,105.16 41.15,106.43 v41.15,116.59
AS2_AN7  (via drill 0.51)
  Top 0.254: v102.62,117.22 v112.14,117.22
  Bottom 0.254: JP35.4 v102.62,117.22 | v112.14,117.22 112.14,108.33 111.51,107.7 109.6,107.7 108.97,107.06 108.97,99.21 JP40.6
AS2_AN8  (via drill 0.51)
  Top 0.254: v117.86,116.59 117.86,140.08 118.49,140.72 v119.13,140.72
  Bottom 0.254: v119.13,140.72 130.56,140.72 131.19,141.35 R68.1 | JP40.1 116.59,105.16 117.86,106.43 v117.86,116.59
AS2_AUTOID  (via drill 0.51)
  Top 0.254: v49.4,51.94 48.77,51.31 48.77,28.45 48.13,27.81 44.96,27.81 44.32,27.18 44.32,18.29 43.69,17.65 36.07,17.65 35.43,18.29 35.43,19.79 JP6.4
  Bottom 0.254: R15.2 v49.4,51.94 U1.14
AS2_AUTOID1  (via drill 0.51)
  Top 0.254: v126.11,51.94 125.48,51.31 125.48,28.45 124.84,27.81 121.67,27.81 121.03,27.18 121.03,18.29 120.4,17.65 112.78,17.65 112.14,18.29 112.14,19.79 JP18.4
  Bottom 0.254: R36.2 v126.11,51.94 U3.14
AS2_AUTOID2  (via drill 0.51)
  Top 0.254: v49.4,131.19 48.77,130.56 48.77,107.7 48.13,107.06 44.96,107.06 44.32,106.43 44.32,97.54 43.69,96.9 36.07,96.9 35.43,97.54 35.43,99.04 JP29.4
  Bottom 0.254: R56.2 v49.4,131.19 U5.14
AS2_AUTOID3  (via drill 0.51)
  Top 0.254: v126.11,131.19 125.48,130.56 125.48,107.7 124.84,107.06 121.67,107.06 121.03,106.43 121.03,97.54 120.4,96.9 112.78,96.9 112.14,97.54 112.14,99.04 JP40.4
  Bottom 0.254: R76.2 v126.11,131.19 U7.14
AS2_VRES
  Bottom 0.254: JP6.3 36.88,26.5 36.83,26.54 | U1.5 38.61,54.48 37.97,53.85 37.97,27.18 37.34,26.54 36.83,26.54 | 36.83,26.54 R16.2
AS2_VRES1
  Bottom 0.254: JP18.3 113.59,26.5 113.54,26.54 | U3.5 115.32,54.48 114.68,53.85 114.68,27.18 114.05,26.54 113.54,26.54 | 113.54,26.54 R34.2
AS2_VRES2
  Bottom 0.254: JP29.3 36.88,105.74 36.83,105.79 | U5.5 38.61,133.73 37.97,133.1 37.97,106.43 37.34,105.79 36.83,105.79 | 36.83,105.79 R54.2
AS2_VRES3
  Bottom 0.254: JP40.3 113.59,105.74 113.54,105.79 | U7.5 115.32,133.73 114.68,133.1 114.68,106.43 114.05,105.79 113.54,105.79 | 113.54,105.79 R74.2
D1_IO1
  Bottom 0.254: JP2.3 48.77,35.43 47.5,34.16 47.5,21.77 JP7.1
D1_IO2  (via drill 0.51)
  Top 0.254: v50.73,37.34 JP7.2
  Bottom 0.254: U1.2 41.78,50.67 42.36,50.1 42.36,38.36 43.38,37.34 v50.73,37.34 63.37,37.34 64.01,37.97 JP2.4
D1_IO3  (via drill 0.51)
  Top 0.254: v50.67,48.13 54.48,48.13 55.12,47.5 v55.12,38.61 55.12,29.72 55.75,29.08 v59.56,29.08
  Bottom 0.254: U1.15 R17.2 51.09,49.19 50.67,48.77 v50.67,48.13 | v55.12,38.61 62.1,38.61 64.01,40.51 JP2.5 | JP7.3 52.58,19.69 52.58,17.65 53.21,17.02 58.29,17.02 59.56,18.29 v59.56,29.08
D1_IO4  (via drill 0.51)
  Top 0.254: v61.47,43.05 v61.47,33.53
  Bottom 0.254: v61.47,43.05 JP2.6 | JP7.6 57.02,22.94 57.02,32.26 58.29,33.53 v61.47,33.53
D1_IO5  (via drill 0.51)
  Top 0.254: v138.18,43.05 v138.18,33.53
  Bottom 0.254: v138.18,43.05 JP15.6 | JP16.6 133.73,22.94 133.73,32.26 135,33.53 v138.18,33.53
D1_IO6  (via drill 0.51)
  Top 0.254: v127.38,48.13 131.19,48.13 131.83,47.5 v131.83,38.61 131.83,29.72 132.46,29.08 v136.27,29.08
  Bottom 0.254: U3.15 R37.2 127.8,49.19 127.38,48.77 v127.38,48.13 | v131.83,38.61 138.81,38.61 140.72,40.51 JP15.5 | JP16.3 129.29,19.69 129.29,17.65 129.92,17.02 135,17.02 136.27,18.29 v136.27,29.08
D1_IO7  (via drill 0.51)
  Top 0.254: v127.44,37.34 JP16.2
  Bottom 0.254: U3.2 118.49,50.67 119.07,50.1 119.07,38.36 120.09,37.34 v127.44,37.34 140.08,37.34 140.72,37.97 JP15.4
D1_IO8
  Bottom 0.254: JP15.3 125.48,35.43 124.21,34.16 124.21,21.77 JP16.1
D1_IO9  (via drill 0.51)
  Top 0.254: v61.47,122.3 v61.47,112.78
  Bottom 0.254: v61.47,122.3 JP26.6 | JP27.6 57.02,102.19 57.02,111.51 58.29,112.78 v61.47,112.78
D1_IO10  (via drill 0.51)
  Top 0.254: v50.67,127.38 54.48,127.38 55.12,126.75 v55.12,117.86 55.12,108.97 55.75,108.33 v59.56,108.33
  Bottom 0.254: U5.15 R57.2 51.09,128.44 50.67,128.02 v50.67,127.38 | v55.12,117.86 62.1,117.86 64.01,119.76 JP26.5 | JP27.3 52.58,98.94 52.58,96.9 53.21,96.27 58.29,96.27 59.56,97.54 v59.56,108.33
D1_IO11  (via drill 0.51)
  Top 0.254: v50.73,116.59 JP27.2
  Bottom 0.254: U5.2 41.78,129.92 42.36,129.35 42.36,117.61 43.38,116.59 v50.73,116.59 63.37,116.59 64.01,117.22 JP26.4
D1_IO12
  Bottom 0.254: JP26.3 48.77,114.68 47.5,113.41 47.5,101.02 JP27.1
D1_IO13  (via drill 0.51)
  Top 0.254: v138.18,122.3 v138.18,112.78
  Bottom 0.254: v138.18,122.3 JP37.6 | JP38.6 133.73,102.19 133.73,111.51 135,112.78 v138.18,112.78
D1_IO14  (via drill 0.51)
  Top 0.254: v127.38,127.38 131.19,127.38 131.83,126.75 v131.83,117.86 131.83,108.97 132.46,108.33 v136.27,108.33
  Bottom 0.254: U7.15 R77.2 127.8,128.44 127.38,128.02 v127.38,127.38 | v131.83,117.86 138.81,117.86 140.72,119.76 JP37.5 | JP38.3 129.29,98.94 129.29,96.9 129.92,96.27 135,96.27 136.27,97.54 v136.27,108.33
D1_IO15  (via drill 0.51)
  Top 0.254: v127.44,116.59 JP38.2
  Bottom 0.254: U7.2 118.49,129.92 119.07,129.35 119.07,117.61 120.09,116.59 v127.44,116.59 140.08,116.59 140.72,117.22 JP37.4
D1_IO16
  Bottom 0.254: JP37.3 125.48,114.68 124.21,113.41 124.21,101.02 JP38.1
D2_IO1  (via drill 0.51)
  Top 0.254: v61.47,45.59 58.29,45.59 57.02,44.32 57.02,31.62 57.66,30.99 60.83,30.99 61.47,30.35 v61.47,28.45
  Bottom 0.254: JP2.7 v61.47,45.59 | v61.47,28.45 61.47,21.46 62.74,20.19 67.49,20.19 JP8.1
D2_IO2  (via drill 0.51, 0.6)
  Top 0.254: v43.69,46.23 v43.69,52.58 | v61.47,48.13 67.82,48.13 68.45,47.5 68.45,29.08 v67.82,28.45
  Bottom 0.254: v43.69,46.23 43.69,43.69 44.32,43.05 58.93,43.05 59.56,43.69 59.56,47.5 60.2,48.13 v61.47,48.13 JP2.8 | v43.69,52.58 43.05,53.21 U1.4 | 69.03,22.73 JP8.2 67.82,24.17 v67.82,28.45
D2_IO3  (via drill 0.51)
  Top 0.254: v54.48,58.29 57.66,58.29 58.29,57.66 58.29,52.58 58.93,51.94 v62.74,51.94 69.72,51.94 70.99,50.67 70.99,28.45 72.9,26.54 76.71,26.54 77.98,25.27 77.98,18.92 76.71,17.65 71.63,17.65 70.84,18.44 JP8.3
  Bottom 0.254: U1.11 R18.2 51.09,57.44 51.94,58.29 v54.48,58.29 | JP1.1 v62.74,51.94
D2_IO4  (via drill 0.51)
  Top 0.254: JP8.6 75.34,24.64 74.71,25.27 72.9,25.27 69.72,28.45 69.72,49.4 69.09,50.04 v62.74,50.04
  Bottom 0.254: JP1.2 61.47,54.48 60.83,53.85 60.83,50.67 61.47,50.04 v62.74,50.04
D2_IO5  (via drill 0.51)
  Top 0.254: JP19.6 152.05,24.64 151.42,25.27 149.61,25.27 146.43,28.45 146.43,49.4 145.8,50.04 v139.45,50.04
  Bottom 0.254: JP12.2 138.18,54.48 137.54,53.85 137.54,50.67 138.18,50.04 v139.45,50.04
D2_IO6  (via drill 0.51)
  Top 0.254: v131.19,58.29 134.37,58.29 135,57.66 135,52.58 135.64,51.94 v139.45,51.94 146.43,51.94 147.7,50.67 147.7,28.45 149.61,26.54 153.42,26.54 154.69,25.27 154.69,18.92 153.42,17.65 148.34,17.65 147.55,18.44 JP19.3
  Bottom 0.254: U3.11 R38.2 127.8,57.44 128.65,58.29 v131.19,58.29 | JP12.1 v139.45,51.94
D2_IO7  (via drill 0.51, 0.6)
  Top 0.254: v120.4,46.23 v120.4,52.58 | v138.18,48.13 144.53,48.13 145.16,47.5 145.16,29.08 v144.53,28.45
  Bottom 0.254: v120.4,46.23 120.4,43.69 121.03,43.05 135.64,43.05 136.27,43.69 136.27,47.5 136.91,48.13 v138.18,48.13 JP15.8 | v120.4,52.58 119.76,53.21 U3.4 | 145.74,22.73 JP19.2 144.53,24.17 v144.53,28.45
D2_IO8  (via drill 0.51)
  Top 0.254: v138.18,45.59 135,45.59 133.73,44.32 133.73,31.62 134.37,30.99 137.54,30.99 138.18,30.35 v138.18,28.45
  Bottom 0.254: JP15.7 v138.18,45.59 | v138.18,28.45 138.18,21.46 139.45,20.19 144.2,20.19 JP19.1
D2_IO9  (via drill 0.51)
  Top 0.254: JP30.6 75.34,103.89 74.71,104.52 72.9,104.52 69.72,107.7 69.72,128.65 69.09,129.29 v62.74,129.29
  Bottom 0.254: JP23.2 61.47,133.73 60.83,133.1 60.83,129.92 61.47,129.29 v62.74,129.29
D2_IO10  (via drill 0.51)
  Top 0.254: v54.48,137.54 57.66,137.54 58.29,136.91 58.29,131.83 58.93,131.19 v62.74,131.19 69.72,131.19 70.99,129.92 70.99,107.7 72.9,105.79 76.71,105.79 77.98,104.52 77.98,98.17 76.71,96.9 71.63,96.9 70.84,97.69 JP30.3
  Bottom 0.254: U5.11 R58.2 51.09,136.69 51.94,137.54 v54.48,137.54 | JP23.1 v62.74,131.19
D2_IO11  (via drill 0.51, 0.6)
  Top 0.254: v43.69,125.48 v43.69,131.83 | v61.47,127.38 67.82,127.38 68.45,126.75 68.45,108.33 v67.82,107.7
  Bottom 0.254: v43.69,125.48 43.69,122.94 44.32,122.3 58.93,122.3 59.56,122.94 59.56,126.75 60.2,127.38 v61.47,127.38 JP26.8 | v43.69,131.83 43.05,132.46 U5.4 | 69.03,101.98 JP30.2 67.82,103.42 v67.82,107.7
D2_IO12  (via drill 0.51)
  Top 0.254: v61.47,124.84 58.29,124.84 57.02,123.57 57.02,110.87 57.66,110.24 60.83,110.24 61.47,109.6 v61.47,107.7
  Bottom 0.254: JP26.7 v61.47,124.84 | v61.47,107.7 61.47,100.71 62.74,99.44 67.49,99.44 JP30.1
D2_IO13  (via drill 0.51)
  Top 0.254: JP41.6 152.05,103.89 151.42,104.52 149.61,104.52 146.43,107.7 146.43,128.65 145.8,129.29 v139.45,129.29
  Bottom 0.254: JP34.2 138.18,133.73 137.54,133.1 137.54,129.92 138.18,129.29 v139.45,129.29
D2_IO14  (via drill 0.51)
  Top 0.254: v131.19,137.54 134.37,137.54 135,136.91 135,131.83 135.64,131.19 v139.45,131.19 146.43,131.19 147.7,129.92 147.7,107.7 149.61,105.79 153.42,105.79 154.69,104.52 154.69,98.17 153.42,96.9 148.34,96.9 147.55,97.69 JP41.3
  Bottom 0.254: U7.11 R78.2 127.8,136.69 128.65,137.54 v131.19,137.54 | JP34.1 v139.45,131.19
D2_IO15  (via drill 0.51, 0.6)
  Top 0.254: v120.4,125.48 v120.4,131.83 | v138.18,127.38 144.53,127.38 145.16,126.75 145.16,108.33 v144.53,107.7
  Bottom 0.254: v120.4,125.48 120.4,122.94 121.03,122.3 135.64,122.3 136.27,122.94 136.27,126.75 136.91,127.38 v138.18,127.38 JP37.8 | v120.4,131.83 119.76,132.46 U7.4 | 145.74,101.98 JP41.2 144.53,103.42 v144.53,107.7
D2_IO16  (via drill 0.51)
  Top 0.254: v138.18,124.84 135,124.84 133.73,123.57 133.73,110.87 134.37,110.24 137.54,110.24 138.18,109.6 v138.18,107.7
  Bottom 0.254: JP37.7 v138.18,124.84 | v138.18,107.7 138.18,100.71 139.45,99.44 144.2,99.44 JP41.1
GND  (via drill 0.51)
  other vias: 44.96,44.32 50.04,67.18 37.97,60.83
  pour Bottom (isolate 0.305): 17.02,83.06 19.56,85.6 70.36,85.6 72.9,83.06 72.9,29.72 74.17,28.45 81.79,28.45 83.06,27.18 83.06,8.13 81.79,6.86 8.13,6.86 6.99,8 6.86,8 6.86,27.18 8.13,28.45 15.75,28.45 17.02,29.72
  pour Top (isolate 0.305): 17.02,83.06 19.56,85.6 70.36,85.6 72.9,83.06 72.9,29.72 74.17,28.45 81.79,28.45 83.06,27.18 83.06,8.13 81.79,6.86 8.13,6.86 8.28,6.88 8.13,6.88 6.86,8.03 6.86,27.18 8.13,28.45 15.75,28.45 17.02,29.72
GND1  (via drill 0.51)
  other vias: 121.67,44.32 126.75,67.18 114.68,60.83
  pour Bottom (isolate 0.305): 93.73,83.06 96.27,85.6 147.07,85.6 149.61,83.06 149.61,29.72 150.88,28.45 158.5,28.45 159.77,27.18 159.77,8.13 158.5,6.86 84.84,6.86 83.69,8 83.57,8 83.57,27.18 84.84,28.45 92.46,28.45 93.73,29.72
  pour Top (isolate 0.305): 93.73,83.06 96.27,85.6 147.07,85.6 149.61,83.06 149.61,29.72 150.88,28.45 158.5,28.45 159.77,27.18 159.77,8.13 158.5,6.86 84.84,6.86 84.99,6.88 84.84,6.88 83.57,8.03 83.57,27.18 84.84,28.45 92.46,28.45 93.73,29.72
GND2  (via drill 0.51)
  other vias: 44.96,123.57 50.04,146.43 37.97,140.08
  pour Bottom (isolate 0.305): 17.02,162.31 19.56,164.85 70.36,164.85 72.9,162.31 72.9,108.97 74.17,107.7 81.79,107.7 83.06,106.43 83.06,87.38 81.79,86.11 8.13,86.11 6.99,87.25 6.86,87.25 6.86,106.43 8.13,107.7 15.75,107.7 17.02,108.97
  pour Top (isolate 0.305): 17.02,162.31 19.56,164.85 70.36,164.85 72.9,162.31 72.9,108.97 74.17,107.7 81.79,107.7 83.06,106.43 83.06,87.38 81.79,86.11 8.13,86.11 8.28,86.13 8.13,86.13 6.86,87.27 6.86,106.43 8.13,107.7 15.75,107.7 17.02,108.97
GND3  (via drill 0.51)
  other vias: 121.67,123.57 126.75,146.43 114.68,140.08
  pour Bottom (isolate 0.305): 93.73,162.31 96.27,164.85 147.07,164.85 149.61,162.31 149.61,108.97 150.88,107.7 158.5,107.7 159.77,106.43 159.77,87.38 158.5,86.11 84.84,86.11 83.69,87.25 83.57,87.25 83.57,106.43 84.84,107.7 92.46,107.7 93.73,108.97
  pour Top (isolate 0.305): 93.73,162.31 96.27,164.85 147.07,164.85 149.61,162.31 149.61,108.97 150.88,107.7 158.5,107.7 159.77,106.43 159.77,87.38 158.5,86.11 84.84,86.11 84.99,86.13 84.84,86.13 83.57,87.27 83.57,106.43 84.84,107.7 92.46,107.7 93.73,108.97
MUX_A0
  Bottom 0.254: U1.10 48.77,57.02 49.4,57.66 49.4,58.93 50.04,59.56 61.47,59.56 62.1,58.93 62.1,57.66 62.74,57.02 JP1.3
MUX_A1
  Bottom 0.254: U1.9 47.5,58.29 48.13,58.93 48.13,59.56 48.77,60.2 62.74,60.2 63.37,59.56 JP1.4
MUX_A2
  Bottom 0.254: U3.10 125.48,57.02 126.11,57.66 126.11,58.93 126.75,59.56 138.18,59.56 138.81,58.93 138.81,57.66 139.45,57.02 JP12.3
MUX_A3
  Bottom 0.254: U3.9 124.21,58.29 124.84,58.93 124.84,59.56 125.48,60.2 139.45,60.2 140.08,59.56 JP12.4
MUX_A4
  Bottom 0.254: U5.10 48.77,136.27 49.4,136.91 49.4,138.18 50.04,138.81 61.47,138.81 62.1,138.18 62.1,136.91 62.74,136.27 JP23.3
MUX_A5
  Bottom 0.254: U5.9 47.5,137.54 48.13,138.18 48.13,138.81 48.77,139.45 62.74,139.45 63.37,138.81 JP23.4
MUX_A6
  Bottom 0.254: U7.10 125.48,136.27 126.11,136.91 126.11,138.18 126.75,138.81 138.18,138.81 138.81,138.18 138.81,136.91 139.45,136.27 JP34.3
MUX_A7
  Bottom 0.254: U7.9 124.21,137.54 124.84,138.18 124.84,138.81 125.48,139.45 139.45,139.45 140.08,138.81 JP34.4
N$1
  Bottom 0.254: R2.2 R6.1 R1.2 33.11,69.3 34.8,70.99 37.34,70.99 37.97,70.36 U2.3
N$2
  Bottom 0.254: R4.1 R3.2
N$3
  Bottom 0.254: R4.2 R5.1 38.39,69.3 38.61,69.09 U2.2
N$4
  Bottom 0.254: R24.1 R23.2
N$5
  Bottom 0.254: R9.2 R10.1
N$6
  Bottom 0.254: U2.5 47.5,71.63 48.77,72.9 53.85,72.9 54.48,72.26 R8.2 R12.1 R7.2
N$8
  Bottom 0.254: U2.6 47.5,70.36 47.71,70.57 R11.1 R10.2
N$9
  Bottom 0.254: R19.2 59.98,79.03 LED1.K
N$24
  Bottom 0.254: R22.2 R26.1 R21.2 109.82,69.3 111.51,70.99 114.05,70.99 114.68,70.36 U4.3
N$25
  Bottom 0.254: R24.2 R25.1 115.1,69.3 115.32,69.09 U4.2
N$26
  Bottom 0.254: R29.2 R30.1
N$28
  Bottom 0.254: U4.5 124.21,71.63 125.48,72.9 130.56,72.9 131.19,72.26 R28.2 R32.1 R27.2
N$29
  Bottom 0.254: U4.6 124.21,70.36 124.42,70.57 R31.1 R30.2
N$30
  Bottom 0.254: R39.2 136.69,79.03 LED2.K
N$31
  Bottom 0.254: R44.1 R43.2
N$32
  Bottom 0.254: R42.2 R46.1 R41.2 33.11,148.55 34.8,150.24 37.34,150.24 37.97,149.61 U6.3
N$33
  Bottom 0.254: R44.2 R45.1 38.39,148.55 38.61,148.34 U6.2
N$34
  Bottom 0.254: R49.2 R50.1
N$35
  Bottom 0.254: U6.5 47.5,150.88 48.77,152.15 53.85,152.15 54.48,151.51 R48.2 R52.1 R47.2
N$36
  Bottom 0.254: U6.6 47.5,149.61 47.71,149.82 R51.1 R50.2
N$37
  Bottom 0.254: R59.2 59.98,158.28 LED3.K
N$38
  Bottom 0.254: R64.1 R63.2
N$39
  Bottom 0.254: R62.2 R66.1 R61.2 109.82,148.55 111.51,150.24 114.05,150.24 114.68,149.61 U8.3
N$40
  Bottom 0.254: R64.2 R65.1 115.1,148.55 115.32,148.34 U8.2
N$41
  Bottom 0.254: R69.2 R70.1
N$42
  Bottom 0.254: U8.5 124.21,150.88 125.48,152.15 130.56,152.15 131.19,151.51 R68.2 R72.1 R67.2
N$43
  Bottom 0.254: U8.6 124.21,149.61 124.42,149.82 R71.1 R70.2
N$44
  Bottom 0.254: R79.2 136.69,158.28 LED4.K
RESET
  Bottom 0.254: JP3.6 24.64,60.83 25.27,61.47 25.27,68.45 24,69.72 24,74.07 24.5,74.57 25.17,74.57 | R20.1 25.17,74.57 | S2.3 25.25,74.65 25.17,74.57
RESET1
  Bottom 0.254: JP14.6 101.35,60.83 101.98,61.47 101.98,68.45 100.71,69.72 100.71,74.07 101.21,74.57 101.88,74.57 | R40.1 101.88,74.57 | S4.3 101.96,74.65 101.88,74.57
RESET2
  Bottom 0.254: JP25.6 24.64,140.08 25.27,140.72 25.27,147.7 24,148.97 24,153.32 24.5,153.82 25.17,153.82 | R60.1 25.17,153.82 | S6.3 25.25,153.9 25.17,153.82
RESET3
  Bottom 0.254: JP36.6 101.35,140.08 101.98,140.72 101.98,147.7 100.71,148.97 100.71,153.32 101.21,153.82 101.88,153.82 | R80.1 101.88,153.82 | S8.3 101.96,153.9 101.88,153.82

## Text on the board
Bottom: v11 | v11 | v11 | v11
Dimension: Route Out | Route Out | Route Out | Route Out | Route Out | Route Out | Route Out | Route Out | Route Out | Route Out | Route Out | Route Out | Route Out | Route Out | Route Out | Route Out | Route Out | Route Out | Route Out
tPlace: RESET | D12 | D13 | RESET | D12 | D13 | Arduino to Vernier Pin-out | Arduino to Vernier Pin-out | GND | GND | D13 | D13 | D12 | D12 | Vernier Sensor / Interface Shield | Vernier Sensor / Interface Shield | 5V | 5V | ANALOG 1 / MUX ADDR 00 / 0-5V / +/-10V / V_RES / IDEN | -> A0 / -> A1 / -> A4 / -> A5 | DIGITAL 1 / MUX ADDR 10 / IO1 -> D2 / IO2 -> D3/A4 / IO3 -> D4/A5 / IO4 -> D5 | ANALOG 1 / MUX ADDR 00 / 0-5V / +/-10V / V_RES / IDEN | -> A0 / -> A1 / -> A4 / -> A5 | DIGITAL 1 / MUX ADDR 10 / IO1 -> D2 / IO2 -> D3/A4 / IO3 -> D4/A5 / IO4 -> D5 | GND | GND | GND | GND | A0 | A0 | A1 | A1 | ANALOG 2 / MUX ADDR 01 / 0-5V / +/-10V / V_RES / IDEN | -> A2 / -> A3 / -> A4 / -> A5 | DIGITAL 2 / MUX ADDR 11 / IO1 -> D6 / IO2 -> D7/A4 / IO3 -> D8/A5 / IO4 -> D9 | ANALOG 2 / MUX ADDR 01 / 0-5V / +/-10V / V_RES / IDEN | -> A2 / -> A3 / -> A4 / -> A5 | DIGITAL 2 / MUX ADDR 11 / IO1 -> D6 / IO2 -> D7/A4 / IO3 -> D8/A5 / IO4 -> D9 | A2 | A2 | A3 | A3 | A4 | D1 | A4 | D1 | A5 | D0 | A5 | D0 | MUX ADDR PINS / LSB -> D10 / MSB -> D11 | MUX ADDR PINS / LSB -> D10 / MSB -> D11 | ANALOG 1 | ANALOG 2 | DIGITAL 1 | DIGITAL 2 | ANALOG 1 | ANALOG 2 | DIGITAL 1 | DIGITAL 2 | RESET | D12 | D13 | RESET | D12 | D13 | Arduino to Vernier Pin-out | Arduino to Vernier Pin-out | GND | GND | D13 | D13 | D12 | D12 | Vernier Sensor / Interface Shield | Vernier Sensor / Interface Shield | 5V | 5V | ANALOG 1 / MUX ADDR 00 / 0-5V / +/-10V / V_RES / IDEN | -> A0 / -> A1 / -> A4 / -> A5 | DIGITAL 1 / MUX ADDR 10 / IO1 -> D2 / IO2 -> D3/A4 / IO3 -> D4/A5 / IO4 -> D5 | ANALOG 1 / MUX ADDR 00 / 0-5V / +/-10V / V_RES / IDEN | -> A0 / -> A1 / -> A4 / -> A5 | DIGITAL 1 / MUX ADDR 10 / IO1 -> D2 / IO2 -> D3/A4 / IO3 -> D4/A5 / IO4 -> D5 | GND | GND | GND | GND | A0 | A0 | A1 | A1 | ANALOG 2 / MUX ADDR 01 / 0-5V / +/-10V / V_RES / IDEN | -> A2 / -> A3 / -> A4 / -> A5 | DIGITAL 2 / MUX ADDR 11 / IO1 -> D6 / IO2 -> D7/A4 / IO3 -> D8/A5 / IO4 -> D9 | ANALOG 2 / MUX ADDR 01 / 0-5V / +/-10V / V_RES / IDEN | -> A2 / -> A3 / -> A4 / -> A5 | DIGITAL 2 / MUX ADDR 11 / IO1 -> D6 / IO2 -> D7/A4 / IO3 -> D8/A5 / IO4 -> D9 | A2 | A2 | A3 | A3 | A4 | D1 | A4 | D1 | A5 | D0 | A5 | D0 | MUX ADDR PINS / LSB -> D10 / MSB -> D11 | MUX ADDR PINS / LSB -> D10 / MSB -> D11 | ANALOG 1 | ANALOG 2 | DIGITAL 1 | DIGITAL 2 | ANALOG 1 | ANALOG 2 | DIGITAL 1 | DIGITAL 2
bPlace: SCL | SCL | SDA | SDA | AREF | AREF | GND | GND | D13 | D13 | IOREF | IOREF | D12 | D12 | RST | RST | D11 | D11 | 3.3V | 3.3V | D10 | D10 | 5V | 5V | D9 | D9 | GND | GND | D8 | D8 | GND | GND | VIN | D7 | VIN | D7 | D6 | D6 | A0 | D5 | A0 | D5 | A1 | D4 | A1 | D4 | A2 | D3 | A2 | D3 | A3 | D2 | A3 | D2 | A4 | D1 | A4 | D1 | A5 | D0 | A5 | D0 | SCL | SCL | SDA | SDA | AREF | AREF | GND | GND | D13 | D13 | IOREF | IOREF | D12 | D12 | RST | RST | D11 | D11 | 3.3V | 3.3V | D10 | D10 | 5V | 5V | D9 | D9 | GND | GND | D8 | D8 | GND | GND | VIN | D7 | VIN | D7 | D6 | D6 | A0 | D5 | A0 | D5 | A1 | D4 | A1 | D4 | A2 | D3 | A2 | D3 | A3 | D2 | A3 | D2 | A4 | D1 | A4 | D1 | A5 | D0 | A5 | D0